# Altium PCB DM0249.PcbDoc (part 1 of 2)
Units mm, origin at the board's own origin, x right, y up, seen from the top; angles counter-clockwise.
Board outline 25 x 23.86 mm, 4 copper layers (Top Copper, Signal Layer 1, Layer 1, Bottom Layer), stack 1.602 mm thick; 50 components, 26 nets, 168 pads, 81 vias.
Unrouted connection lines stored in the file: 43.
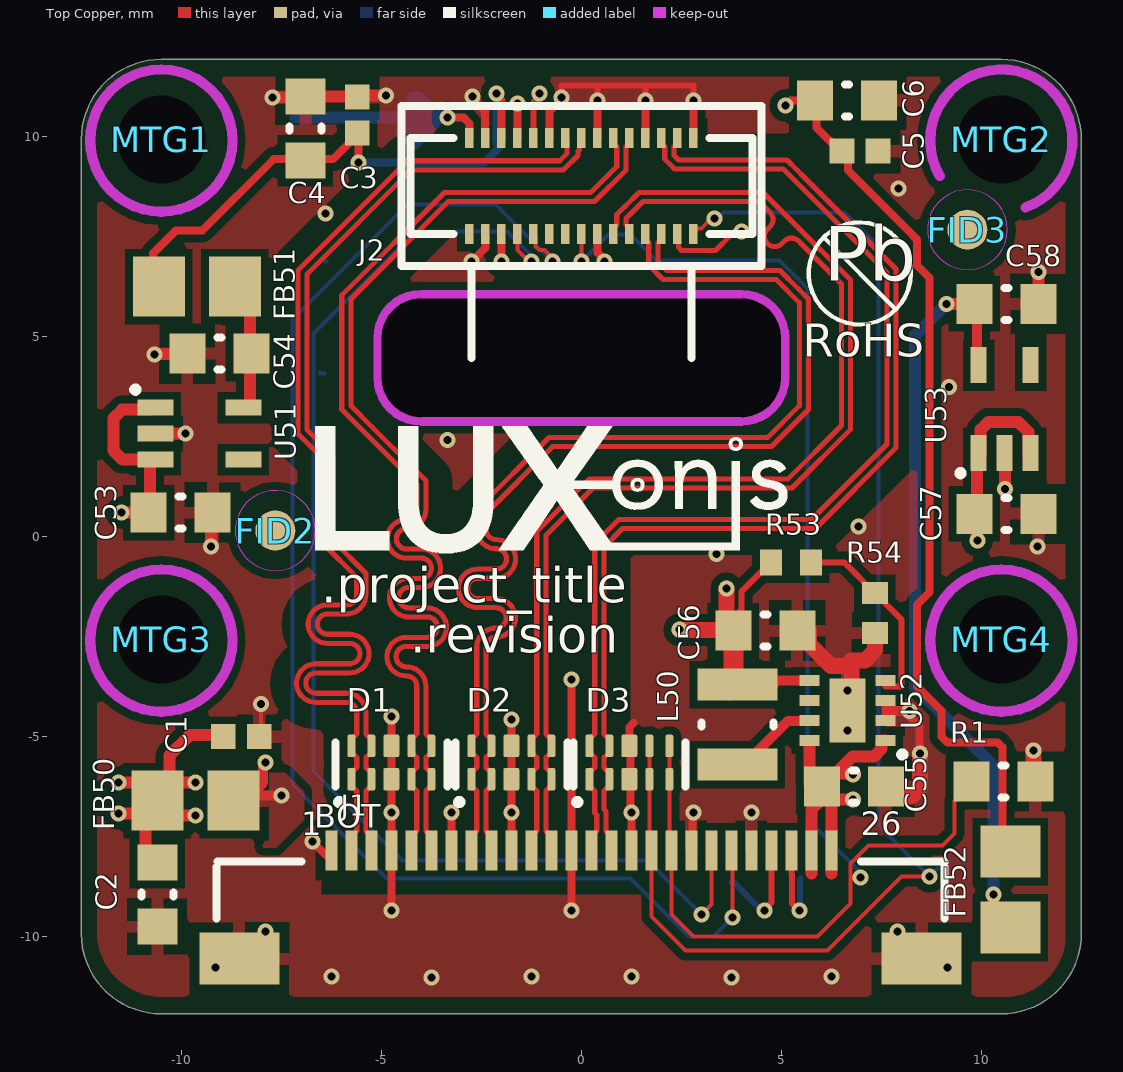
[diagram p0: Top Copper view]
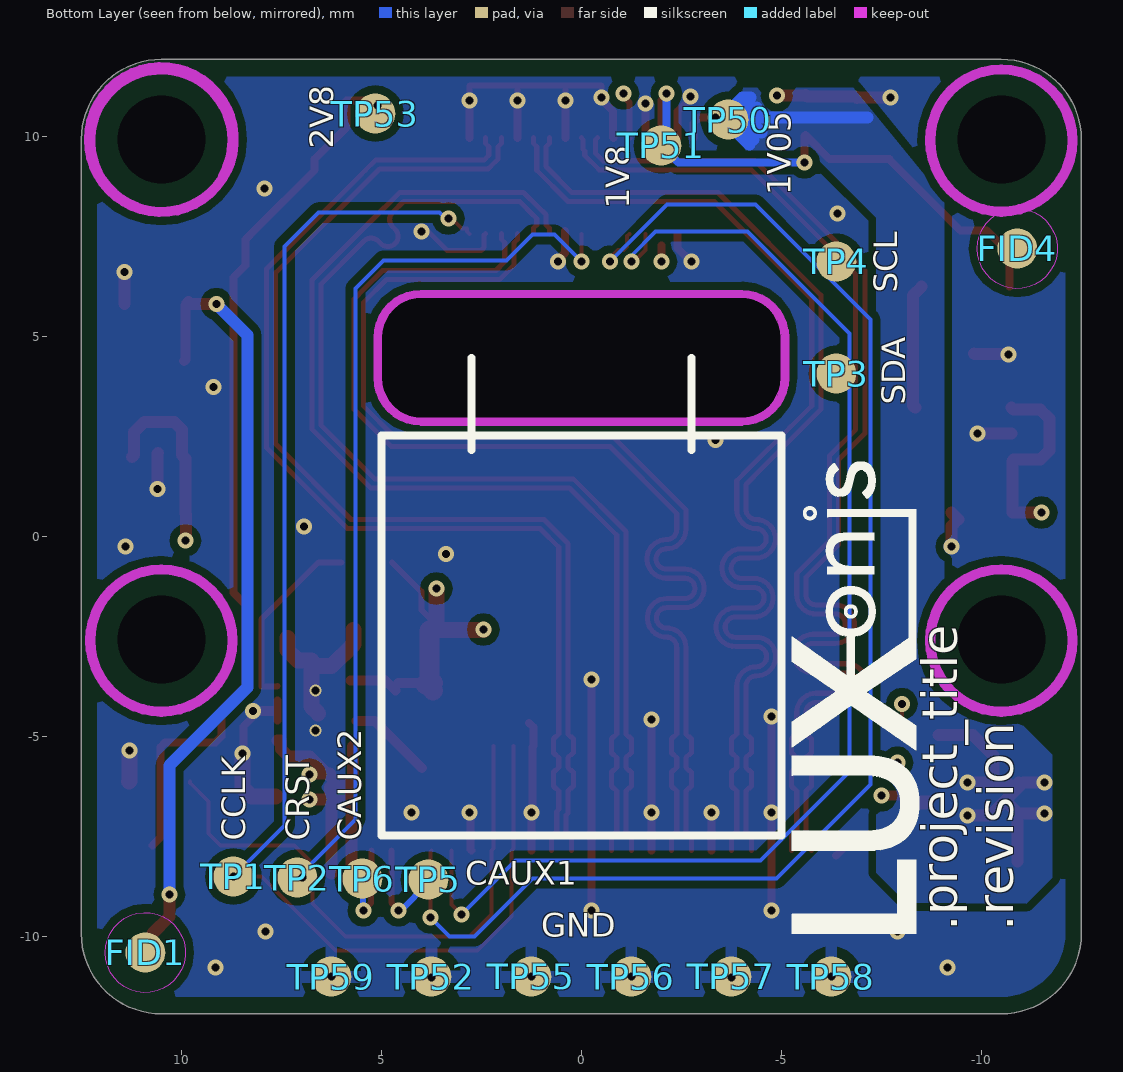
[diagram p1: Bottom Layer view, seen from below]
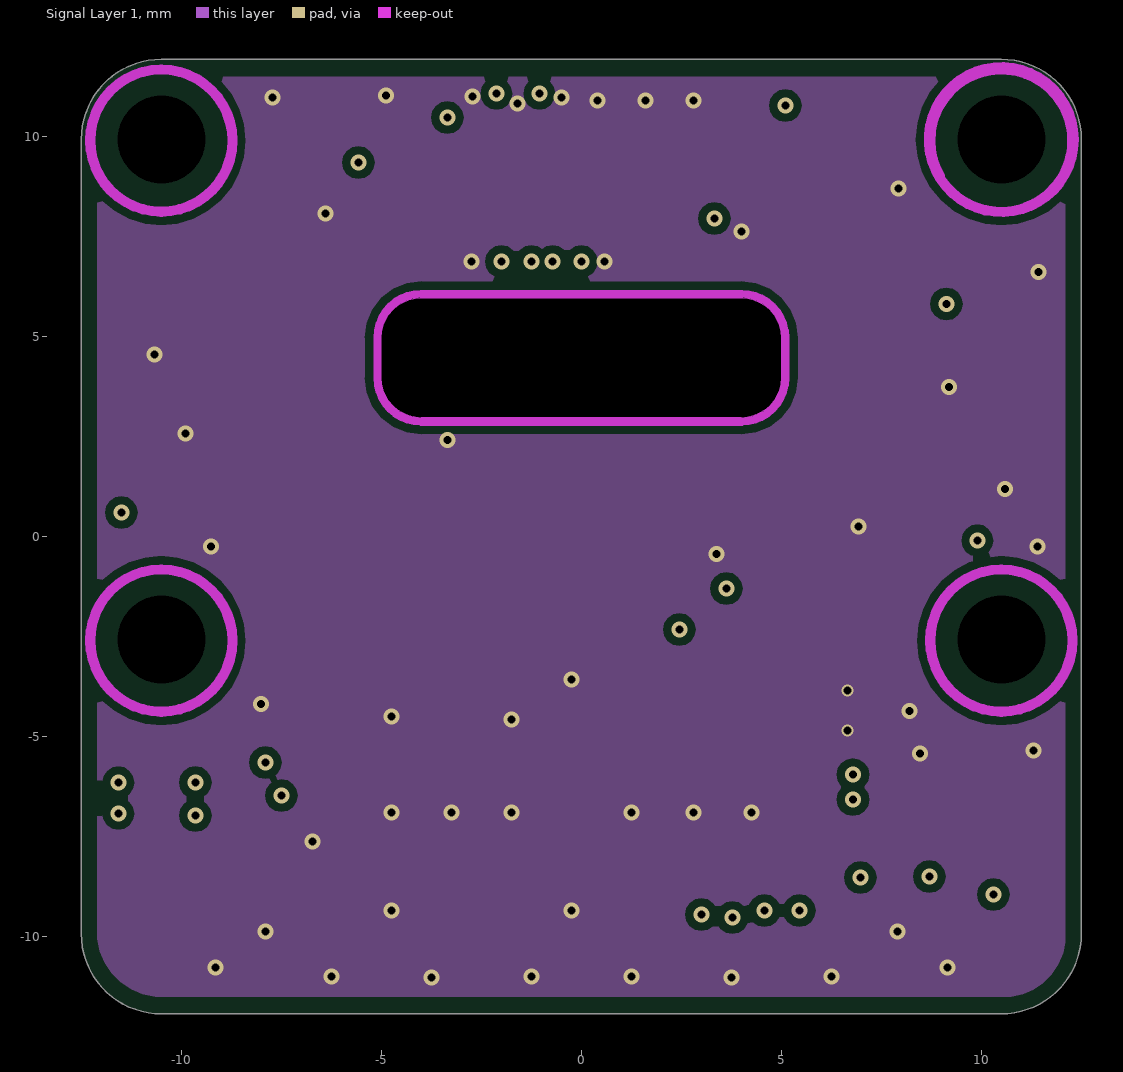
[diagram p2: Signal Layer 1]
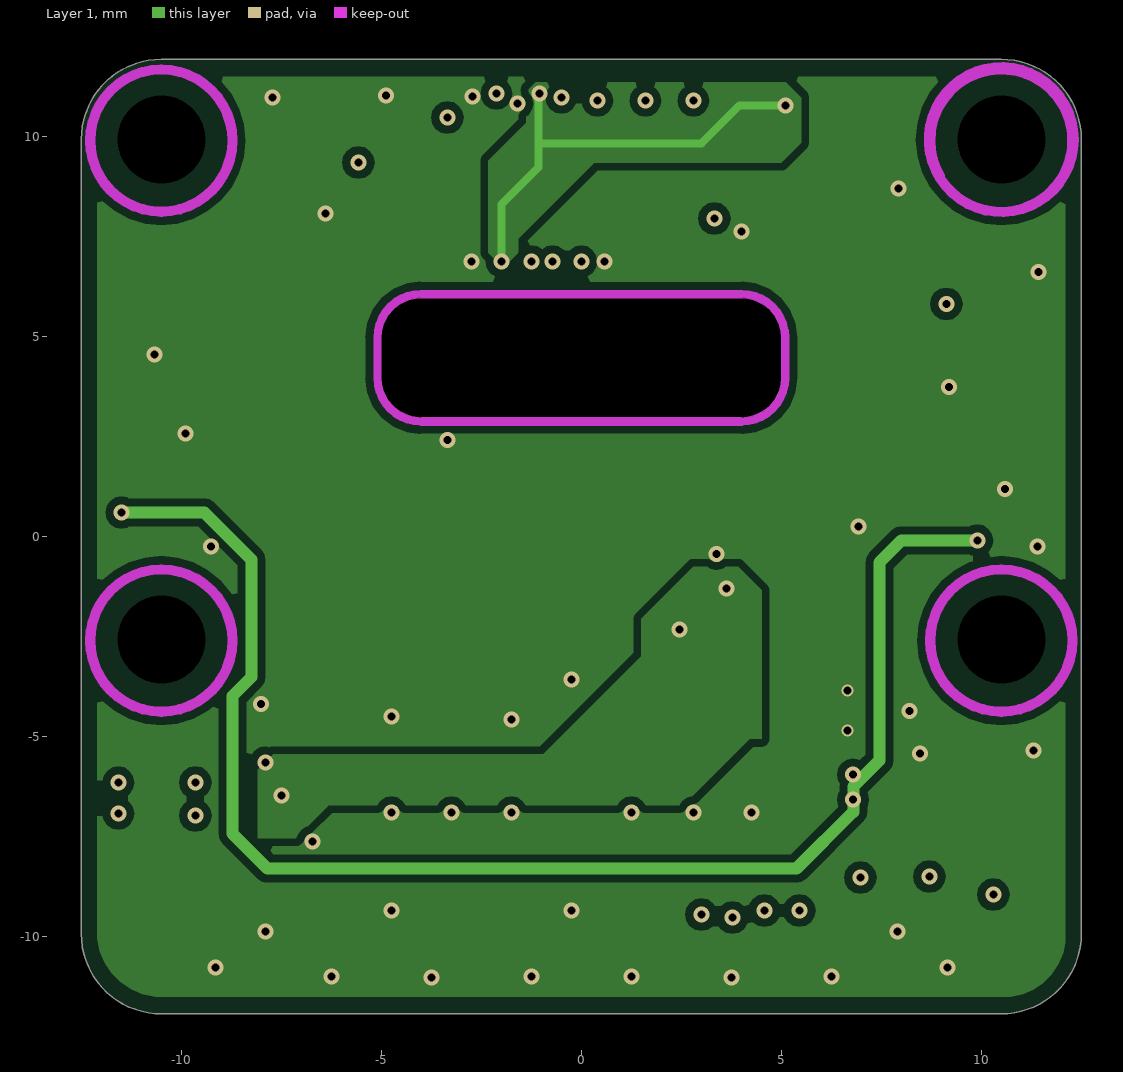
[diagram p3: Layer 1]

## Layer stack, top to bottom
Top Mask: solder mask 0.018, Solder Resist, Dk 4.2
Top Copper: signal copper 0.0356
Dielectric 1: prepreg 0.18, PP-021, Dk 4.2
Signal Layer 1: signal copper 0.0356
Core: core 1.1, Core-042, Dk 4.2
Layer 1: signal copper 0.0356
Dielectric 2: prepreg 0.18, PP-021, Dk 4.2
Bottom Layer: signal copper 0.0356
Bottom Solder: solder mask 0.018, Solder Resist, Dk 4.2

## Board outline
-12.5,-9.931 -12.5,9.931 cw(c-10.5,9.931) -10.5,11.931 10.5,11.931 cw(c10.5,9.931) 12.5,9.931 12.5,-9.931 cw(c10.5,-9.931) 10.5,-11.931 -10.5,-11.931 cw(c-10.5,-9.931)

## Design rules (kind name [scope] priority, off if disabled: settings)
AssemblyTestPointUsage [All] p1 off:
AssemblyTestpoint [All] p1 off: testpointundercomponent=TRUE minsize=1.016 maxsize=2.54 preferedsize=1.524 minholesize=0 maxholesize=1.016 preferedholesize=0.813 testpointgrid=0.025 usegrid=TRUE gridtolerance=0 allowsidetop=TRUE allowsidebottom=TRUE
BoardOutlineClearance [All] p1: gap=0.381 ignorepadtopadclearanceinfootprint=FALSE
Clearance "0.6plane clearence" [InPolygon vs InNetClass('SENSORMIPI')] p1: gap=0.6 ignorepadtopadclearanceinfootprint=FALSE except(0: Arc-Hole Track-Hole SMDPad-Hole THPad-Hole Via-Hole Fill-Hole Poly-Hole Region-Hole Text-Hole; 0.2: Arc-Via Track-Via SMDPad-Via THPad-Via Via-Via Via-Fill Via-Poly Via-Region Via-Text)
Clearance Poly [InPolygon] p2: gap=0.2 ignorepadtopadclearanceinfootprint=FALSE except(0: Arc-Hole Track-Hole SMDPad-Hole THPad-Hole Via-Hole Fill-Hole Poly-Hole Region-Hole Text-Hole)
Clearance [All] p3: gap=0.1 ignorepadtopadclearanceinfootprint=FALSE except(0: Arc-Hole Track-Hole SMDPad-Hole THPad-Hole Via-Hole Fill-Hole Poly-Hole Region-Hole Text-Hole)
ComponentClearance [All] p1 off: gap=0.254 collisioncheckmode=3 verticalgap=0.254 showdistances=FALSE
DiffPairsRouting DiffPair_SENSORMIPI_DiffPairsRouting [InDifferentialPairClass('SENSORMIPI')] p1: maxlimit=0.254 minlimit=0.102 mostfreqgap=0.254 toplayer_maxgap=0.102 toplayer_prefgap=0.102 toplayer_minwidth=0.127 toplayer_maxwidth=0.127 toplayer_prefwidth=0.127 bottomlayer_maxgap=0.102 bottomlayer_prefgap=0.102 bottomlayer_minwidth=0.127 bottomlayer_maxwidth=0.127 bottomlayer_prefwidth=0.127 impedanceprofiledriven=TRUE impedanceprofileid={A69A43D8-E903-443C-922A-36361071E35C} impedanceprofilevalue=100.000000 maxuncoupledlength=12.7
DiffPairsRouting [All] p2: maxlimit=0.254 minlimit=0.102 mostfreqgap=0.254 toplayer_maxgap=0.102 toplayer_prefgap=0.102 toplayer_minwidth=0.127 toplayer_maxwidth=0.127 toplayer_prefwidth=0.127 bottomlayer_maxgap=0.102 bottomlayer_prefgap=0.102 bottomlayer_minwidth=0.127 bottomlayer_maxwidth=0.127 bottomlayer_prefwidth=0.127 impedanceprofiledriven=TRUE impedanceprofileid={A69A43D8-E903-443C-922A-36361071E35C} impedanceprofilevalue=100.000000 maxuncoupledlength=12.7
FabricationTestPointUsage [All] p1 off: valid=0 allowmultiple=FALSE
FabricationTestpoint [All] p1 off: side=3 testpointundercomponent=TRUE minsize=1.016 maxsize=2.54 preferedsize=1.524 minholesize=0 maxholesize=1.016 preferedholesize=0.813 testpointgrid=0.025 allowsidetop=TRUE allowsidebottom=TRUE usegrid=TRUE gridtolerance=0
FanoutControl Fanout_BGA [IsBGA] p1 off: bgadir=Out bgaviamode=Centered fanoutstyle=Auto fanoutdirection=Alternating viagrid=0.025 // Fanout_BGA (Default Rule)
FanoutControl Fanout_LCC [IsLCC] p2 off: bgadir=Out bgaviamode=Centered fanoutstyle=Auto fanoutdirection=Alternating viagrid=0.025 // Fanout_LCC (Default Rule)
FanoutControl Fanout_SOIC [IsSOIC] p3 off: bgadir=Out bgaviamode=Centered fanoutstyle=Auto fanoutdirection=Alternating viagrid=0.025 // Fanout_SOIC (Default Rule)
FanoutControl Fanout_Small [(CompPinCount < 5)] p4 off: bgadir=Out bgaviamode=Centered fanoutstyle=Auto fanoutdirection=OutThenIn viagrid=0.025 // Fanout_Small (Default Rule)
FanoutControl Fanout_Default [All] p5 off: bgadir=Out bgaviamode=Centered fanoutstyle=Auto fanoutdirection=Alternating viagrid=0.025 // Fanout_Default (Default Rule)
Height [All] p1 off: minheight=0 maxheight=25.4 prefheight=12.7
HoleSize [All] p1 off: absolutevalues=TRUE maxlimit=2.54 minlimit=0.13 maxpercent=80.000 minpercent=20.000
HoleToHoleClearance [All] p1: gap=0.21 allowstackedmicrovias=TRUE
LayerPairs [All] p1 off: enforce=TRUE
Length "InNet('CAM1_C_P') Or InNet('CAM1_D1_P')" [InNet('CAM1_C_P') Or InNet('CAM1_D1_P')] p1: maxlimit=40.882 minlimit=0
MatchedLengths MatchedLengths-SENSORMIPI [InNetClass('SENSORMIPI')] p1: tolerance=0.25 checknetsindiffpair=TRUE checkdiffpairvsdiffpair=FALSE checkxsignals=FALSE checkothers=FALSE
MatchedLengths DiffPair_SENSORMIPI_MatchedLengths [InNetClass('SENSORMIPI')] p2: tolerance=0.5 checknetsindiffpair=FALSE checkdiffpairvsdiffpair=TRUE checkxsignals=TRUE checkothers=TRUE
MinimumSolderMaskSliver [All] p1 off: minsoldermaskwidth=0.254
PasteMaskExpansion [All] p1 off: expansion=0
PlaneClearance [All] p1: clearance=0.3
PlaneConnect via [IsVia] p1: planeconnectstyle=Direct reliefexpansion=0.508 reliefentries=4 reliefconductorwidth=0.254 reliefairgap=0.254
PlaneConnect [All] p2: planeconnectstyle=Relief reliefexpansion=0.3 reliefentries=4 reliefconductorwidth=0.4 reliefairgap=0.3
PolygonConnect GND_VIA [isvia] p1: connectstyle=Direct reliefconductorwidth=0.254 reliefentries=4 polygonreliefangle="90 Angle" airgapwidth=0.254
PolygonConnect [All] p2: connectstyle=Relief reliefconductorwidth=0.3 reliefentries=4 polygonreliefangle="90 Angle" airgapwidth=0.254
RoomDefinition DM0249_BW235_IMX378 [InComponentClass('DM0249_BW235_IMX378')] p1: confinementstyle=ConfineIn formatcopy=TRUE lockcomponents=FALSE outline -196.555,-73.08 -145.755,-73.08 -145.755,-47.68 -196.555,-47.68
RoutingCorners [All] p1 off: cornerstyle=45-Degree minsetback=2.54 maxsetback=2.54
RoutingPriority [All] p1 off: routingpriority=0
RoutingTopology [All] p1 off: topology=Shortest
RoutingVias [All] p1: holewidth=0.15 width=0.275 viastyle="Through Hole" minholewidth=0.13 minwidth=0.275 maxholewidth=0.4 maxwidth=0.8
SMDNeckDown [All] p1 off: percent=50.000
SilkToSilkClearance [All] p1 off: silktosilkclearance=0.254
SilkToSolderMaskClearance SilkscreenOverComponentPads [IsPad] p1 off: minsilkscreentomaskgap=0.254 clearancetoexposedcopper=TRUE
SolderMaskExpansion [All] p1 off: expansion=0.102 istentingtop=FALSE
Width [All] p1: maxlimit=5 minlimit=0.1 preferedwidth=0.1 minimp=50.000000 maximp=50.000000 favimp=50.000000
6 further rules are at their usual default settings.

## Classes and differential pairs
component class DM0249_BW235_IMX378: C1 C2 C3 C4 C5 C6 D1 D2 D3 FID1 FID2 FID3 FID4 J1 J2 MTG1 MTG2 MTG3 MTG4 R1 TP1 TP2 TP3 TP4 TP5 TP6
component class Power: C53 C54 C55 C56 C57 C58 FB50 FB51 FB52 L50 R53 R54 TP50 TP51 TP52 TP53 TP55 TP56 TP57 TP58 TP59 U51 U52 U53
net class SENSORMIPI: MIPI_C_N MIPI_C_P MIPI_D0_N MIPI_D0_P MIPI_D1_N MIPI_D1_P MIPI_D2_N MIPI_D2_P MIPI_D3_N MIPI_D3_P
differential pair MIPI_C: +MIPI_C_P -MIPI_C_N
differential pair MIPI_D0: +MIPI_D0_P -MIPI_D0_N
differential pair MIPI_D1: +MIPI_D1_P -MIPI_D1_N
differential pair MIPI_D2: +MIPI_D2_P -MIPI_D2_N
differential pair MIPI_D3: +MIPI_D3_P -MIPI_D3_N

## Components (designator, comment, footprint, x,y, rotation, side; value= is the part's Value field where it differs from the comment)
C1 "0.1uF 0402" CAPC0402(1005)70_N -8.5,-5 r180 top
C2 "10uF 0603" CAPC0603(1608)100_N -10.6,-8.95 r90 top
C3 "0.1uF 0402" CAPC0402(1005)70_N -5.602,10.537 r270 top
C4 "10uF 0603" CAPC0603(1608)100_N -6.897,10.196 r270 top
C5 "0.1uF 0402" CAPC0402(1005)70_N 6.966,9.636 r180 top
C6 "10uF 0603" CAPC0603(1608)100_N 6.636,10.906 r180 top
C53 "10uF 0603" CAPC0603(1608)100_N -10.016,0.6 r180 top
C54 "10uF 0603" CAPC0603(1608)100_N -9.05,4.573 r0 top
C55 "10uF 0603" CAPC0603(1608)100_N 6.815,-6.252 r180 top
C56 "22uF 0603" CAPC0603(1608)100_N 4.6,-2.35 r180 top
C57 "10uF 0603" CAPC0603(1608)100_N 10.625,0.565 r180 top
C58 "10uF 0603" CAPC0603(1608)100_N 10.625,5.815 r180 top
D1 "TPD4E02B04DQAR" TPD4E02B04DQAR -4.75,-5.65 r0 top
D2 "TPD4E02B04DQAR" TPD4E02B04DQAR -1.75,-5.65 r0 top
D3 "TPD4E02B04DQAR" TPD4E02B04DQAR 1.2,-5.65 r0 top
FB50 "600R/100MHz" 2508056017Y2 -9.65,-6.6 r180 top
FB51 "600R/100MHz" 2508056017Y2 -9.61,6.248 r180 top
FB52 "600R/100MHz" 2508056017Y2 10.725,-8.825 r90 top
FID1 "FIDUCIAL_ROUND_1MM" FIDUCIAL_ROUND_1MM 10.9,-10.4 r180 bottom
FID2 "FIDUCIAL_ROUND_1MM" FIDUCIAL_ROUND_1MM -7.65,0.15 r90 top
FID3 "FIDUCIAL_ROUND_1MM" FIDUCIAL_ROUND_1MM 9.652,7.671 r90 top
FID4 "FIDUCIAL_ROUND_1MM" FIDUCIAL_ROUND_1MM -10.9,7.2 r90 bottom
J1 "CONN FFC TOP 26POS 0.50MM R/A" 5052782633 -6.25,-7.85 r0 top locked
J2 "24-5804-030-000-829+" A12N02A-201_1.6mmbrd_MatedModule 0,8.77 r180 top locked
L50 "1uH, 3.2A, 20%" DFE252012P-1R0M=P2 3.9,-4.7 r90 top
MTG1 "" MOUNTING_HOLE_M2_RPI_CAM -10.5,9.931 r90 top locked
MTG2 "" MOUNTING_HOLE_M2_RPI_CAM 10.5,9.931 r90 top locked
MTG3 "" MOUNTING_HOLE_M2_RPI_CAM -10.5,-2.569 r90 top locked
MTG4 "" MOUNTING_HOLE_M2_RPI_CAM 10.5,-2.569 r90 top locked
R1 "10K 0603" RESC0603(1608)_N 10.55,-6.125 r0 top
R53 "53.6k 0402" RESC0402(1005)_N 5.237,-0.643 r180 top
R54 "39.2k 0402" RESC0402(1005)_N 7.341,-1.912 r90 top
TP1 "TP100_150_NS" TP100_150_NS 8.7,-8.5 r90 bottom
TP2 "TP100_150_NS" TP100_150_NS 7.1,-8.525 r90 bottom
TP3 "TP100_150_NS" TP100_150_NS -6.375,4.075 r90 bottom
TP4 "TP100_150_NS" TP100_150_NS -6.375,6.875 r90 bottom
TP5 "TP100_150_NS" TP100_150_NS 3.825,-8.575 r90 bottom
TP6 "TP100_150_NS" TP100_150_NS 5.475,-8.55 r90 bottom
TP50 "TP100_150_NS" TP100_150_NS -3.675,10.425 r0 bottom
TP51 "TP100_150_NS" TP100_150_NS -2,9.775 r180 bottom
TP52 "TP100_150_NS" TP100_150_NS 3.75,-11 r90 bottom
TP53 "TP100_150_NS" TP100_150_NS 5.15,10.575 r0 bottom
TP55 "TP100_150_NS" TP100_150_NS 1.25,-11 r90 bottom
TP56 "TP100_150_NS" TP100_150_NS -1.25,-11 r90 bottom
TP57 "TP100_150_NS" TP100_150_NS -3.75,-11 r90 bottom
TP58 "TP100_150_NS" TP100_150_NS -6.25,-11 r90 bottom
TP59 "TP100_150_NS" TP100_150_NS 6.25,-11 r90 bottom
U51 "TLV70018DCK" TLV70018DCK -9.55,2.573 r270 top
U52 "TLV62080DSG" TLV62080DSG 6.65,-4.35 r180 top
U53 "TLV70028DCK" TLV70028DCK 10.582,3.185 r0 top locked

## Footprints (in the part's own frame and the unit in brackets; to place one, negate y for a bottom-side part, rotate by r counter-clockwise, add the part's x,y. Pads: shape width x height; smd on the part's side, far side on the other; paste and mask are expansions set on the pad)
2508056017Y2 [mm] "2508056017Y2 Chip Inductor, 2-Leads, Body 2.00x1.25mm"
  rect 1.3x1.5 smd: 1(-0.95,0) 2(0.95,0)
  body extent -1.1,-0.72 1.1,0.72, height 1.45
5052782633 [mm] "26pin Molex FFC 0.5mm TOP"
  rect 0.3x1 smd: 1(0,0) 2(0.5,0) 3(1,0) 4(1.5,0) 5(2,0) 6(2.5,0) 7(3,0) 8(3.5,0) 9(4,0) 10(4.5,0) 11(5,0) 12(5.5,0) 13(6,0) 14(6.5,0) 15(7,0) 16(7.5,0) 17(8,0) 18(8.5,0) 19(9,0) 20(9.5,0) 21(10,0) 22(10.5,0) 23(11,0) 24(11.5,0) 25(12,0) 26(12.5,0)
  rect 2x1.3 smd: MP1(-2.3,-2.7) MP2(14.757,-2.7)
  silkscreen extent -2.87,-1.7 15.34,-0.27, body extent -3.01,-5.08 15.49,0.22, height 1.88
A12N02A-201_1.6mmbrd_MatedModule [mm] "connector: 24-5804-030-000-829+ (1.4mm height w/ module mated)"
  rect 0.22x0.5 smd mask+0.05: 1(-2.8,-1.2) 2(-2.4,-1.2) 3(-2,-1.2) 4(-1.6,-1.2) 5(-1.2,-1.2) 6(-0.8,-1.2) 7(-0.4,-1.2) 8(0,-1.2) 9(0.4,-1.2) 10(0.8,-1.2) 11(1.2,-1.2) 12(1.6,-1.2) 13(2,-1.2) 14(2.4,-1.2) 15(2.8,-1.2) 16(2.8,1.2) 17(2.4,1.2) 18(2,1.2) 19(1.6,1.2) 20(1.2,1.2) 21(0.8,1.2) 22(0.4,1.2) 23(0,1.2) 24(-0.4,1.2) 25(-0.8,1.2) 26(-1.2,1.2) 27(-1.6,1.2) 28(-2,1.2) 29(-2.4,1.2) 30(-2.8,1.2)
  Bottom Layer keep-out region: -4.999,16.237 4.999,16.237 4.999,6.239 -4.999,6.239
  Keep-Out Layer board cut-out: -5,4.8 -4.924,5.183 -4.707,5.507 -4.383,5.724 -4,5.8 -4,5.8 4,5.8 4.383,5.724 4.707,5.507 4.924,5.183 5,4.8 5,4.8 5,3.8 4.924,3.417 4.707,3.093 4.383,2.876 4,2.8 4,2.8 -4,2.8 -4.383,2.876 -4.707,3.093 -4.924,3.417 -5,3.8 -5,3.8
  Keep-Out Layer lines w0.2: 5.1,4.8 ccw(c4,4.8) 4,5.9 -4,5.9 ccw(c-4,4.8) -5.1,4.8 -5.1,3.8 ccw(c-4,3.8) -4,2.7 0,2.7 4,2.7 ccw(c4,3.8) 5.1,3.8 5.1,4.8
  silkscreen extent -4.5,-2 4.5,4.3, body extent -5,-5.72 5,16.24, height 6.18
CAPC0402(1005)70_N [mm] "Chip Capacitor, Body 1.0x0.5mm, Height 0.7mm, IPC Medium Density"
  rect 0.62x0.62 smd: 1(-0.45,0) 2(0.45,0)
  body extent -0.55,-0.3 0.55,0.3, height 0.7
CAPC0603(1608)100_N [mm] "Chip Capacitor, Body 1.6x0.8mm, Height 1.0mm, IPC Medium Density"
  rect 0.9x1 smd: 1(-0.8,0) 2(0.8,0)
  silkscreen extent -0.05,-0.4 0.05,0.4, body extent -0.87,-0.48 0.88,0.47, height 1
DFE252012P-1R0M=P2 [mm] "Chip Inductor, 2-Leads, Body 2.40x2.00mm, IPC High Density"
  rect 0.8x2 smd: 1(-1,0) 2(1,0)
  silkscreen extent -0.05,-0.9 0.05,0.9, body extent -1.25,-1.1 1.25,1.1, height 1.2
FIDUCIAL_ROUND_1MM [mm] "Round, 1mm dia"
  round 1 smd paste-1 mask+0.5: 1(0,0)
  Top Copper keep-out circle w0.025: c0,0 r1
MOUNTING_HOLE_M2_RPI_CAM [mil] "NPTH 2.2mm Hole Used in Raspberry Pi Camera"
  round 60 hole 86.61 unplated: 1(0,0)
RESC0402(1005)_N [mm] "Chip Resistor, Body 1.0x0.5mm, IPC Medium Density"
  rect 0.55x0.65 smd: 1(-0.5,0) 2(0.5,0)
  body extent -0.52,-0.27 0.53,0.28, height 0.4
RESC0603(1608)_N [mm] "Chip Resistor, Body 1.6x0.8mm, IPC Medium Density"
  rect 0.9x1 smd: 1(-0.8,0) 2(0.8,0)
  silkscreen extent -0.05,-0.4 0.05,0.4, body extent -0.85,-0.47 0.85,0.47, height 0.6
TLV62080DSG [mm] "WSON-8, 2.1mm x 2.1mm x 0.8mm"
  rect 0.5x0.28 smd mask+0.07: 1(-0.95,0.75) 2(-0.95,0.25) 3(-0.95,-0.25) 4(-0.95,-0.75) 5(0.95,-0.75) 6(0.95,-0.25) 7(0.95,0.25) 8(0.95,0.75)
  rect 0.9x1.6 smd mask+0.07: 9(0,0)
  silkscreen extent -1.4,1.07 -1.35,1.13, body extent -1.05,-1.05 1.05,1.05, height 0.8
TLV70018DCK [mm] "SC70-5 1.1mm"
  rect 0.4x0.9 smd paste-0.025 mask+0.05: 1(-0.65,-1.1) 2(0,-1.1) 3(0.65,-1.1) 4(0.65,1.1) 5(-0.65,1.1)
  silkscreen extent -1.13,-1.63 -1.07,-1.57, body extent -1.1,-1.2 1.1,1.2, height 1.1
TLV70028DCK [mm] "SC70-5 1.1mm"
  rect 0.4x0.9 smd paste-0.025 mask+0.05: 1(-0.65,-1.1) 2(0,-1.1) 3(0.65,-1.1) 4(0.65,1.1) 5(-0.65,1.1)
  silkscreen extent -1.13,-1.63 -1.07,-1.57, body extent -1.1,-1.2 1.1,1.2, height 1.1
TP100_150_NS [mm] "1mm dia pad, 1.5mm clearance, no silk screen"
  round 1 smd paste-2: 1(0,0)
TPD4E02B04DQAR [mm] "TPD4E02B04DQAR"
  rrect50% 0.2x0.565 smd mask+0.07: 1(-1,-0.417) 2(-0.5,-0.417) 4(0.5,-0.417) 5(1,-0.417) 6(1,0.417) 7(0.5,0.417) 9(-0.5,0.417) 10(-1,0.417)
  rrect25% 0.4x0.565 smd mask+0.07: 3(0,-0.417) 8(0,0.417)
  silkscreen extent -1.4,-1.01 1.4,0.5, body extent -1.2,-0.71 1.2,0.71, height 0.55

## Part data
C1 C3 C5: library part GRM155R71A104JA01D, "CAP CER 0.1UF 10V X7R 0402 5%", Capacitance=100nF, Case/Package=0402, Case Code (Metric)=1005, Dielectric=X7R, Manufacturer 1=Murata, Max Operating Temperature=125°C, Min Operating Temperature=-55°C, Package Quantity=10000, Supplier Part Number 1=490-10777-1-ND, Tolerance=5%, Voltage Rating=10V, Case Code (Imperial)=0402, ComponentLink1Description=https://datasheet.ciiva.com/5411/product-5411135.pdf?src-supplier=Mouser, ComponentLink1URL=https://datasheet.ciiva.com/5411/product-5411135.pdf?src-supplier=Mouser, ComponentLink2Description=https://datasheet.ciiva.com/11618/c02e-11618821.pdf?src-supplier=Avnet, ComponentLink2URL=https://datasheet.ciiva.com/11618/c02e-11618821.pdf?src-supplier=Avnet, Depth=0.5mm, Height=0.5mm, Lead Free="Lead Free", Length=1mm, Manufacturer Part Number 1=GRM155R71A104JA01D, Mount="Surface Mount", Packaging="Tape and Reel", Pricing 1="1=0.10000, 10=0.02500, 100=0.01130, 500=0.00806, 1000=0.00633, 2500=0.00575, 5000=0.00529 (USD)", Radiation Hardening=No, RoHS=Yes, Stock 1=1346709, Supplier 1=Digi-Key, Termination=SMD/SMT, Thickness=0.022inch, Voltage Rating (DC)=10V, Width=0.02inch
C2 C4 C6 C53 C54 C55 C57 C58: library part GRM188R61A106ME69D, "CAP CER 10UF 10V X5R 0603 20%", Capacitance=10uF, Case/Package=0603, Case Code (Metric)=1608, Dielectric=X5R, Manufacturer 1=Murata, Max Operating Temperature=85°C, Min Operating Temperature=-55°C, Package Quantity=4000, Supplier Part Number 1=490-10475-1-ND, Tolerance=20%, Voltage Rating=10V, Case Code (Imperial)=0603, ComponentLink1Description=http://www.mouser.com/ds/2/281/c02e-2905.pdf?src-supplier=Mouser, ComponentLink1URL=http://www.mouser.com/ds/2/281/c02e-2905.pdf?src-supplier=Mouser, ComponentLink2Description=http://components.arrow.com/part/dataview/0323_06119472?src-supplier=Arrow+Europe, ComponentLink2URL=http://components.arrow.com/part/dataview/0323_06119472?src-supplier=Arrow+Europe, ComponentLink3Description=http://www.farnell.com/datasheets/2048014.pdf?src-supplier=Farnell, ComponentLink3URL=http://www.farnell.com/datasheets/2048014.pdf?src-supplier=Farnell, ComponentLink4Description=http://www.farnell.com/datasheets/1872210.pdf?src-supplier=Farnell, ComponentLink4URL=http://www.farnell.com/datasheets/1872210.pdf?src-supplier=Farnell, ComponentLink5Description=http://search.murata.co.jp/Ceramy/image/img/A01X/G101/ENG/GRM188R61A106ME69-01.pdf?src-supplier=Digi-Key, ComponentLink5URL=http://search.murata.co.jp/Ceramy/image/img/A01X/G101/ENG/GRM188R61A106ME69-01.pdf?src-supplier=Digi-Key, ComponentLink6Description=http://www.farnell.com/datasheets/1872210.pdf?src-supplier=Newark, ComponentLink6URL=http://www.farnell.com/datasheets/1872210.pdf?src-supplier=Newark, ComponentLink7Description=http://www.farnell.com/datasheets/2048014.pdf?src-supplier=Element14, ComponentLink7URL=http://www.farnell.com/datasheets/2048014.pdf?src-supplier=Element14, ComponentLink8Description=http://www.farnell.com/datasheets/2048014.pdf?src-supplier=Newark, ComponentLink8URL=http://www.farnell.com/datasheets/2048014.pdf?src-supplier=Newark, Depth=0.8mm, Height=0.8mm, Lead Free="Lead Free", Length=1.6mm, Manufacturer Part Number 1=GRM188R61A106ME69D, Material=Ceramic, Mount="Surface Mount", Packaging="Tape and Reel", Pricing 1="1=0.21000, 10=0.14100, 100=0.07130, 500=0.04876, 1000=0.04313 (USD)", REACH SVHC=Unknown, RoHS=Yes, Stock 1=2873098, Supplier 1=Digi-Key, Termination=SMD/SMT, Thickness=0.035inch, Voltage Rating (DC)=10V, Weight=0.000222oz, Width=0.8mm
C56: library part GRM188R61A226ME15D, "CAP CER 22UF 10V X5R 0603 20%", Capacitance=22uF, Case/Package=0603, Case Code (Metric)=1608, Dielectric=X5R, Manufacturer 1=Murata, Max Operating Temperature=85°C, Min Operating Temperature=-55°C, Package Quantity=4000, Supplier Part Number 1=490-10476-1-ND, Tolerance=20%, Voltage Rating=10V, Case Code (Imperial)=0603, ComponentLink1Description=https://datasheet.ciiva.com/46444/1769893-46444975.pdf?src-supplier=Element14, ComponentLink1URL=https://datasheet.ciiva.com/46444/1769893-46444975.pdf?src-supplier=Element14, Depth=0.8mm, Height=0.8mm, Lead Free="Lead Free", Length=1.6mm, Manufacturer Part Number 1=GRM188R61A226ME15D, Material=Ceramic, Mount="Surface Mount", Packaging="Tape and Reel", Pricing 1="1=0.31000, 10=0.21500, 100=0.12160, 500=0.08584, 1000=0.07512 (USD)", REACH SVHC="No SVHC", RoHS=Yes, Stock 1=984716, Supplier 1=Digi-Key, Termination=SMD/SMT, Thickness=0.039inch, Voltage Rating (DC)=10V, Weight=0.000222oz, Width=0.8mm
D1 D2 D3: "TVS DIODE 3.6V 8.8V 10USON 8.8V (Typ) Clamp 5A (8/20µs) Ipp Tvs Diode Surface Mount 10-USON (2.5x1)", Clamping Voltage=8.8V, Manufacturer 1="Texas Instruments", Max Operating Temperature=125°C, Min Breakdown Voltage=5.5V, Min Operating Temperature=-40°C, Operating Supply Voltage=3.6V, Peak Pulse Current=5A, Peak Pulse Power=17W, Power Line Protection=No, Supplier Part Number 1=296-43875-1-ND, ComponentLink1Description=http://www.ti.com/general/docs/lit/getliterature.tsp?genericPartNumber=TPD4E02B04&amp;&amp;fileType=pdf&src-supplier=Element14, ComponentLink1URL=http://www.ti.com/general/docs/lit/getliterature.tsp?genericPartNumber=TPD4E02B04&amp;&amp;fileType=pdf&src-supplier=Element14, ComponentLink2Description=http://www.ti.com/lit/ds/symlink/tpd4e02b04.pdf?src-supplier=Farnell, ComponentLink2URL=http://www.ti.com/lit/ds/symlink/tpd4e02b04.pdf?src-supplier=Farnell, ComponentLink3Description=http://www.ti.com/lit/ds/symlink/tpd4e02b04.pdf?src-supplier=Newark, ComponentLink3URL=http://www.ti.com/lit/ds/symlink/tpd4e02b04.pdf?src-supplier=Newark, ComponentLink4Description=http://www.ti.com/lit/ds/symlink/tpd4e02b04.pdf?src-supplier=Digi-Key, ComponentLink4URL=http://www.ti.com/lit/ds/symlink/tpd4e02b04.pdf?src-supplier=Digi-Key, Composition=Zener, Interface=USB,HDMI, Lead Free="Lead Free", Manufacturer Part Number 1=TPD4E02B04DQAR, Mount="Surface Mount", Number of Bidirectional Channels=4, Number of Channels=4, Number of Pins=10, Packaging="Cut Tape", Pricing 1="1=0.69000, 10=0.60800, 100=0.46650, 500=0.36874, 1000=0.29499 (USD)", REACH SVHC="No SVHC", Reverse Standoff Voltage=3.6V, RoHS=Yes, Stock 1=25615, Supplier 1=Digi-Key
FB50 FB51 FB52: library part 2508056017Y2, "FERRITE BEAD, 0.1OHM, 2A, 0805, 600R/100MHz", Case/Package=0805, Case Code (Metric)=2012, Current Rating=2A, DC Resistance (DCR)=100mR, Frequency=100MHz, Manufacturer 1=Fair-Rite, Max Operating Temperature=125°C, Min Operating Temperature=-55°C, Package Quantity=4000, Resistance=350mR, Supplier Part Number 1=1934-1487-1-ND, Tolerance=25%, Case Code (Imperial)=0805, ComponentLink1Description=https://datasheet.ciiva.com/3854/3802508056017y2-3854245.pdf?src-supplier=Arrow, ComponentLink1URL=https://datasheet.ciiva.com/3854/3802508056017y2-3854245.pdf?src-supplier=Arrow, ComponentLink2Description=https://datasheet.ciiva.com/22735/652149-22735047.pdf?src-supplier=Element14, ComponentLink2URL=https://datasheet.ciiva.com/22735/652149-22735047.pdf?src-supplier=Element14, ComponentLink3Description=https://datasheet.ciiva.com/1127/26143-1127514.pdf?src-supplier=Farnell, ComponentLink3URL=https://datasheet.ciiva.com/1127/26143-1127514.pdf?src-supplier=Farnell, ComponentLink4Description=https://datasheet.ciiva.com/18090/getdatasheetpartid-212640-18090187.pdf?src-supplier=Verical, ComponentLink4URL=https://datasheet.ciiva.com/18090/getdatasheetpartid-212640-18090187.pdf?src-supplier=Verical, ComponentLink5Description=https://datasheet.ciiva.com/7620/26143-7620140.pdf?src-supplier=Element14, ComponentLink5URL=https://datasheet.ciiva.com/7620/26143-7620140.pdf?src-supplier=Element14, DC Current=2A, Depth=1.25mm, Height=0.9mm, Impedance=600R, Length=2mm, Manufacturer Part Number 1=2508056017Y2, Max DC Current=2A, Military Standard=Not, Number of Pins=2, Packaging="Tape and Reel", Pricing 1="1=0.10000, 10=0.07900, 25=0.07120, 50=0.05240, 100=0.04520, 250=0.03568, 500=0.03014, 1000=0.02538 (USD)", Radiation Hardening=No, REACH SVHC="No SVHC", RoHS=Yes, Stock 1=100491, Supplier 1=Digi-Key, Termination=SMD/SMT, Test Frequency=100MHz, Width=1.25mm
FID1 FID2 FID3 FID4: library part FIDUCIAL, "Fiducial with various available footprints"
J1: library part 5052782633, "0.5 Ffc Zif Btm Cont Embt Pkg 0.5 Fpc Zif Btm FS19", Current Rating=500mA, Flammability Rating="UL94 V-0", Manufacturer=Molex, Manufacturer Part Number=505278-2633, Max Operating Temperature=85°C, Min Operating Temperature=-40°C, Supplier Part Number 1=WM24290CT-ND, Voltage Rating=50V, Actuator Material=Nylon,Glass,Polyamide, Category=Connectors, ComponentLink1Description=http://www.molex.com/pdm_docs/sd/5052782633_sd.pdf?src-supplier=Digi-Key, ComponentLink1URL=http://www.molex.com/pdm_docs/sd/5052782633_sd.pdf?src-supplier=Digi-Key, Contact Material=Bronze, Contact Plating=Tin, Housing Material=Polymer, Mount="Surface Mount", Number of Positions=26, Packaging="Tape and Reel", Pitch=0.02inch, Pricing 1="1=0,85000, 10=0,70400, 100=0,58660, 1000=0,46928 (USD)", RoHS=Yes, Stock 1=8571, Supplier 1=Digi-Key, Termination=Solder
J2: library part A12N02A-201_Connector_(1.6mm_brd), "CONN Series 5804 board to board 0.4mm pitch 30 way connector", Manufacturer 1="Kyocera International Electronic Components", Manufacturer Part Number 1=245804030000829+, Supplier Part Number 1=478-12013-1-ND, ComponentLink1Description=http://global.kyocera.com/prdct/electro/product/pdf/5804.pdf?src-supplier=Digi-Key, ComponentLink1URL=http://global.kyocera.com/prdct/electro/product/pdf/5804.pdf?src-supplier=Digi-Key, MAN=AVX/KYOCERA, MAN PN=24-5804-030-000-829+, Pricing 1="1=1.69000, 10=1.53600, 25=1.44200, 50=1.37940, 100=1.31670, 250=1.19132, 500=1.09726, 1000=0.94050 (USD)", RoHS=Yes, Stock 1=11469, Supplier 1=Digi-Key
L50: library part DFE252012P-1R0M=P2, "FIXED IND 1UH 3.2A 42 MOHM SMD", Case/Package=1008, Case Code (Metric)=2520, Current Rating=4.3A, DC Resistance (DCR)=42mR, Inductance=1uH, Manufacturer=Murata, Manufacturer Part Number=DFE252012P-1R0M=P2, Max DC Current=3.2A, Max Operating Temperature=125°C, Min Operating Temperature=-40°C, Supplier Part Number 1=490-10647-1-ND, Test Frequency=1MHz, Tolerance=20%, Case Code (Imperial)=1008, ComponentLink1Description=http://www.farnell.com/datasheets/2550134.pdf?src-supplier=Farnell, ComponentLink1URL=http://www.farnell.com/datasheets/2550134.pdf?src-supplier=Farnell, ComponentLink2Description=https://www.murata.com/~/media/webrenewal/products/inductor/chip/tokoproducts/wirewoundmetalalloychiptype/m_dfe252012p.ashx?src-supplier=Digi-Key, ComponentLink2URL=https://www.murata.com/~/media/webrenewal/products/inductor/chip/tokoproducts/wirewoundmetalalloychiptype/m_dfe252012p.ashx?src-supplier=Digi-Key, ComponentLink3Description=http://www.murata.com/~/media/webrenewal/products/inductor/chip/tokoproducts/wirewoundmetalalloychiptype/m_dfe252012p.ashx?src-supplier=Digi-Key, ComponentLink3URL=http://www.murata.com/~/media/webrenewal/products/inductor/chip/tokoproducts/wirewoundmetalalloychiptype/m_dfe252012p.ashx?src-supplier=Digi-Key, ComponentLink4Description=http://www.toko.co.jp/products/pdf/inductors/dfe252012p.pdf?src-supplier=Avnet, ComponentLink4URL=http://www.toko.co.jp/products/pdf/inductors/dfe252012p.pdf?src-supplier=Avnet, Composition=Wirewound, Core Material=Ferrite, Depth=2mm, Height - Seated (Max)=0.039inch, Length=0.098inch, Manufacturer 1=Murata, Manufacturer 2=Murata, Manufacturer 3=Murata, Manufacturer 4=Murata, Manufacturer Part Number 1=DFE252012P-1R0M=P2, Manufacturer Part Number 2=DFE252012P-1R0M=P2, Manufacturer Part Number 3=DFE252012P-1R0M=P2, Manufacturer Part Number 4=DFE252012P-1R0M=P2, Mount="Surface Mount", Packaging="Tape and Reel", Pricing 1="1=0.43000, 10=0.37800, 100=0.27030, 500=0.22702, 1000=0.18377 (USD)", Pricing 2="1=0.43000, 10=0.37800, 100=0.27030, 500=0.22702, 1000=0.18377 (USD)", Pricing 3="1=0.43000, 10=0.37900, 50=0.37900, 100=0.27000, 1000=0.18400, 10000=0.14600 (USD)", Pricing 4="1=0.64000, 10=0.56500, 100=0.40500, 500=0.34000, 1000=0.27500 (SGD)", RoHS=Yes, Shielding=Shielded, Stock 1=2560, Stock 2=95, Stock 3=667, Stock 4=41, Supplier 1=Digi-Key, Supplier 2=Digi-Key, Supplier 3=Mouser, Supplier 4=Element14, Supplier Part Number 2=490-10647-6-ND, Supplier Part Number 3=81-DFE252012P-1R0MP2, Supplier Part Number 4=2530071, Width=0.079inch
MTG1 MTG2 MTG3 MTG4: "=CurrentFootprint", B - Value="Not a Part", A - Level=0
R1: library part RC0603FR-0710KL, "RES SMD 10K OHM 1% 1/10W 0603", Case/Package=0603, Case Code (Metric)=1608, Manufacturer 1=Yageo, Max Operating Temperature=155°C, Min Operating Temperature=-55°C, Power Rating=100mW, Resistance=10kR, Supplier Part Number 1=311-10.0KHRCT-ND, Temperature Coefficient=100ppm/°C, Tolerance=1%, Voltage Rating=75V, Voltage Rating (DC)=50V, Case Code (Imperial)=0603, ComponentLink1Description=https://datasheet.ciiva.com/7660/38590-7660789.pdf?src-supplier=Element14, ComponentLink1URL=https://datasheet.ciiva.com/7660/38590-7660789.pdf?src-supplier=Element14, ComponentLink2Description=https://datasheet.ciiva.com/15189/getdatasheetpartid-409289-15189591.pdf?src-supplier=Verical, ComponentLink2URL=https://datasheet.ciiva.com/15189/getdatasheetpartid-409289-15189591.pdf?src-supplier=Verical, ComponentLink3Description=https://datasheet.ciiva.com/46440/1868787-46440891.pdf?src-supplier=Element14, ComponentLink3URL=https://datasheet.ciiva.com/46440/1868787-46440891.pdf?src-supplier=Element14, ComponentLink4Description=https://datasheet.ciiva.com/7983/443971-7983596.pdf?src-supplier=Element14, ComponentLink4URL=https://datasheet.ciiva.com/7983/443971-7983596.pdf?src-supplier=Element14, ComponentLink5Description=https://datasheet.ciiva.com/7746/1738695-7746239.pdf?src-supplier=Element14, ComponentLink5URL=https://datasheet.ciiva.com/7746/1738695-7746239.pdf?src-supplier=Element14, ComponentLink6Description=https://datasheet.ciiva.com/22747/443971-22747519.pdf?src-supplier=Element14, ComponentLink6URL=https://datasheet.ciiva.com/22747/443971-22747519.pdf?src-supplier=Element14, Composition="Thick Film", Depth=0.8mm, Height=0.45mm, Lead Free="Lead Free", Lead Pitch=0.3mm, Length=1.6mm, Manufacturer 2=Yageo, Manufacturer 3=Yageo, Manufacturer Part Number 1=RC0603FR-0710KL, Manufacturer Part Number 2=RC0603FR-0710KL, Manufacturer Part Number 3=RC0603FR-0710KL, Military Standard=Not, Number of Pins=2, Packaging="Tape and Reel", Pricing 1="1=0.10000, 10=0.02200, 100=0.00890, 1000=0.00401, 2500=0.00348 (USD)", Pricing 2="1=0.10000, 10=0.02200, 100=0.00890, 1000=0.00401, 2500=0.00348 (USD)", Pricing 3="5000=0.00261, 10000=0.00227, 25000=0.00199, 50000=0.00183, 125000=0.00179 (USD)", REACH SVHC="No SVHC", RoHS=Yes, Stock 1=80414305, Stock 2=80414305, Stock 3=80410000, Supplier 1=Digi-Key, Supplier 2=Digi-Key, Supplier 3=Digi-Key, Supplier Part Number 2=311-10.0KHRDKR-ND, Supplier Part Number 3=311-10.0KHRTR-ND, Termination=SMD/SMT, Weight=7.1E-05oz, Width=0.8mm
R53: library part CRCW040253K6FKED, "RES SMD 53.6K OHM 1% 1/16W 0402", Case/Package=0402, Case Code (Metric)=1005, Manufacturer 1=Vishay, Max Operating Temperature=155°C, Max Power Dissipation=63mW, Min Operating Temperature=-55°C, Package Quantity=10, Resistance=53.6kR, Supplier Part Number 1=541-53.6KLCT-ND, Temperature Coefficient=100ppm/°C, Tolerance=1%, Voltage Rating=50V, Case Code (Imperial)=0402, ComponentLink1Description=https://datasheet.ciiva.com/5542/dcrcwe3-109170-5542453.pdf?src-supplier=Mouser, ComponentLink1URL=https://datasheet.ciiva.com/5542/dcrcwe3-109170-5542453.pdf?src-supplier=Mouser, ComponentLink2Description=https://datasheet.ciiva.com/7815/1697337-7815992.pdf?src-supplier=Element14, ComponentLink2URL=https://datasheet.ciiva.com/7815/1697337-7815992.pdf?src-supplier=Element14, ComponentLink3Description=https://datasheet.ciiva.com/7815/1697337-7815993.pdf?src-supplier=Element14, ComponentLink3URL=https://datasheet.ciiva.com/7815/1697337-7815993.pdf?src-supplier=Element14, ComponentLink4Description=https://datasheet.ciiva.com/16208/dcrcwe3-16208556.pdf?src-supplier=Future+Electronics, ComponentLink4URL=https://datasheet.ciiva.com/16208/dcrcwe3-16208556.pdf?src-supplier=Future+Electronics, ComponentLink5Description=https://datasheet.ciiva.com/2464/dcrcwe3-2464093.pdf?src-supplier=Digi-Key, ComponentLink5URL=https://datasheet.ciiva.com/2464/dcrcwe3-2464093.pdf?src-supplier=Digi-Key, ComponentLink6Description=https://datasheet.ciiva.com/2464/dcrcwe3-2464094.pdf?src-supplier=Digi-Key, ComponentLink6URL=https://datasheet.ciiva.com/2464/dcrcwe3-2464094.pdf?src-supplier=Digi-Key, ComponentLink7Description=https://datasheet.ciiva.com/3256/dcrcwe3-3256638.pdf?src-supplier=Avnet, ComponentLink7URL=https://datasheet.ciiva.com/3256/dcrcwe3-3256638.pdf?src-supplier=Avnet, ComponentLink8Description=https://datasheet.ciiva.com/2464/dcrcwe3-2464095.pdf?src-supplier=Digi-Key, ComponentLink8URL=https://datasheet.ciiva.com/2464/dcrcwe3-2464095.pdf?src-supplier=Digi-Key, ComponentLink9Description=https://datasheet.ciiva.com/3256/dcrcwe3-3256639.pdf?src-supplier=Avnet, ComponentLink9URL=https://datasheet.ciiva.com/3256/dcrcwe3-3256639.pdf?src-supplier=Avnet, Composition="Thick Film", Contact Plating=Tin, Depth=0.5mm, Features="Automotive AEC-Q200", Height=0.016inch, Length=1mm, Manufacturer Part Number 1=CRCW040253K6FKED, Military Standard=Not, Number of Pins=2, Number of Terminations=2, Packaging="Tape and Reel", Power Rating=63mW, Pricing 1="1=0.10000, 10=0.03800, 100=0.01540, 1000=0.00690, 2500=0.00599, 5000=0.00495 (USD)", Radiation Hardening=No, REACH SVHC=Unknown, RoHS=Yes, Stock 1=82953, Supplier 1=Digi-Key, Weight=2.3E-05oz, Width=0.5mm
R54: library part CRCW040239K2FKED, "RES SMD 39.2K OHM 1% 1/16W 0402", Case/Package=0402, Case Code (Metric)=1005, Manufacturer 1=Vishay, Max Operating Temperature=155°C, Max Power Dissipation=63mW, Min Operating Temperature=-55°C, Package Quantity=10, Resistance=39.2kR, Supplier Part Number 1=541-39.2KLCT-ND, Temperature Coefficient=100ppm/°C, Tolerance=1%, Voltage Rating=50V, Case Code (Imperial)=0402, ComponentLink1Description=https://datasheet.ciiva.com/11818/0900766b80d98824-11818068.pdf?src-supplier=RSComponents, ComponentLink1URL=https://datasheet.ciiva.com/11818/0900766b80d98824-11818068.pdf?src-supplier=RSComponents, ComponentLink2Description=https://datasheet.ciiva.com/16882/dcrcwe3-16882152.pdf?src-supplier=Avnet+Europe, ComponentLink2URL=https://datasheet.ciiva.com/16882/dcrcwe3-16882152.pdf?src-supplier=Avnet+Europe, ComponentLink3Description=https://datasheet.ciiva.com/2463/dcrcwe3-2463561.pdf?src-supplier=Digi-Key, ComponentLink3URL=https://datasheet.ciiva.com/2463/dcrcwe3-2463561.pdf?src-supplier=Digi-Key, ComponentLink4Description=https://datasheet.ciiva.com/3256/dcrcwe3-3256469.pdf?src-supplier=Avnet, ComponentLink4URL=https://datasheet.ciiva.com/3256/dcrcwe3-3256469.pdf?src-supplier=Avnet, ComponentLink5Description=https://datasheet.ciiva.com/2463/dcrcwe3-2463559.pdf?src-supplier=Digi-Key, ComponentLink5URL=https://datasheet.ciiva.com/2463/dcrcwe3-2463559.pdf?src-supplier=Digi-Key, ComponentLink6Description=https://datasheet.ciiva.com/2463/dcrcwe3-2463560.pdf?src-supplier=Digi-Key, ComponentLink6URL=https://datasheet.ciiva.com/2463/dcrcwe3-2463560.pdf?src-supplier=Digi-Key, ComponentLink7Description=https://datasheet.ciiva.com/16774/70201119-16774809.pdf?src-supplier=Allied+Electronics, ComponentLink7URL=https://datasheet.ciiva.com/16774/70201119-16774809.pdf?src-supplier=Allied+Electronics, ComponentLink8Description=https://datasheet.ciiva.com/22869/70201119-22869593.pdf?src-supplier=Allied+Electronics, ComponentLink8URL=https://datasheet.ciiva.com/22869/70201119-22869593.pdf?src-supplier=Allied+Electronics, ComponentLink9Description=https://datasheet.ciiva.com/16429/dcrcwe3-16429962.pdf?src-supplier=Future+Electronics, ComponentLink9URL=https://datasheet.ciiva.com/16429/dcrcwe3-16429962.pdf?src-supplier=Future+Electronics, ComponentLink10Description=https://datasheet.ciiva.com/7671/1697337-7671596.pdf?src-supplier=Element14, ComponentLink10URL=https://datasheet.ciiva.com/7671/1697337-7671596.pdf?src-supplier=Element14, ComponentLink11Description=https://datasheet.ciiva.com/7671/1533075-7671772.pdf?src-supplier=Element14, ComponentLink11URL=https://datasheet.ciiva.com/7671/1533075-7671772.pdf?src-supplier=Element14, Composition="Thick Film", Contact Plating=Tin, Depth=0.5mm, Features="Automotive AEC-Q200", Height=0.35mm, Lead Free="Lead Free", Length=1mm, Manufacturer Part Number 1=CRCW040239K2FKED, Military Standard=Not, Number of Pins=2, Number of Terminations=2, Packaging="Tape and Reel", Power Rating=63mW, Pricing 1="1=0.10000, 10=0.03800, 100=0.01540, 1000=0.00690, 2500=0.00599, 5000=0.00495 (USD)", Radiation Hardening=No, REACH SVHC=Unknown, RoHS=Yes, Stock 1=46258, Supplier 1=Digi-Key, Termination=SMD/SMT, Voltage Rating (DC)=50V, Weight=2.3E-05oz, Width=0.5mm
TP1 TP2 TP3 TP4 TP5 TP6 TP50 TP51 TP52 TP53 TP55 TP56 TP57 TP58 TP59: library part TEST_POINT
U51: "IC REG LINEAR 1.8V 200MA SC70-5 Linear Voltage Regulator IC  1 Output  200mA SC-70-5", Case/Package=SC, Dropout Voltage=175mV, Manufacturer 1="Texas Instruments", Manufacturer Part Number 1=TLV70018DCKR, Manufacturer Part Number 2=TLV70018DCKT, Max Input Voltage=5.5V, Max Operating Temperature=125°C, Max Output Current=200mA, Max Output Voltage=1.8V, Max Power Dissipation=320mW, Min Current Limit=220mA, Min Input Voltage=2V, Min Operating Temperature=-40°C, Nominal Supply Current=31uA, Output Voltage Accuracy=2%, Package Quantity=1, Quiescent Current=30uA, Supplier Part Number 1=296-32409-1-ND, Accuracy=2%, ComponentLink1Description=https://datasheet.ciiva.com/41462/001014631-da-01-en-ic-reg-ldo-1-8v-0-tlv70018dckr-sot-5-tid-41462480.pdf?src-supplier=Conrad, ComponentLink1URL=https://datasheet.ciiva.com/41462/001014631-da-01-en-ic-reg-ldo-1-8v-0-tlv70018dckr-sot-5-tid-41462480.pdf?src-supplier=Conrad, ComponentLink2Description=https://datasheet.ciiva.com/22700/1882059-22700171.pdf?src-supplier=Element14, ComponentLink2URL=https://datasheet.ciiva.com/22700/1882059-22700171.pdf?src-supplier=Element14, ComponentLink3Description=https://datasheet.ciiva.com/14149/tlv700-eng-ds-14149837.pdf?src-supplier=Distrelec, ComponentLink3URL=https://datasheet.ciiva.com/14149/tlv700-eng-ds-14149837.pdf?src-supplier=Distrelec, ComponentLink4Description=https://datasheet.ciiva.com/7992/1882059-7992894.pdf?src-supplier=Element14, ComponentLink4URL=https://datasheet.ciiva.com/7992/1882059-7992894.pdf?src-supplier=Element14, Contact Plating=Gold, Height=1mm, Lead Free="Lead Free", Length=2.15mm, Manufacturer 2="Texas Instruments", Min Output Voltage=1.8V, Nominal Output Voltage=1.8V, Number of Outputs=1, Number of Pins=5, Number of Regulators=1, Output Current=200mA, Output Type=Fixed, Output Voltage=1.8V, Packaging="Tape and Reel", Polarity=Positive, Power Dissipation=320mW, Power Rating=320mW, Pricing 1="1=0.48000, 10=0.40900, 100=0.30570, 500=0.24020, 1000=0.18561 (USD)", Pricing 2="1=0.55000, 10=0.46700, 100=0.34900 (USD)", Radiation Hardening=No, REACH SVHC="No SVHC", RoHS=Yes, Stock 1=63905, Stock 2=13188, Supplier 1=Digi-Key, Supplier 2=Digi-Key, Supplier Part Number 2=296-25269-1-ND, Width=1.4mm
U52: "IC REG BUCK ADJ 1.2A SYNC 8WSON", Manufacturer 1="Texas Instruments", Manufacturer Part Number 1=TLV62080DSGR, Manufacturer Part Number 2=TLV62080DSGT, Max Input Voltage=5.5V, Max Operating Temperature=125°C, Max Output Current=1.2A, Max Output Voltage=4V, Min Input Voltage=2.5V, Min Operating Temperature=-40°C, Min Output Voltage=500mV, Nominal Supply Current=30uA, Package Quantity=3000, Supplier Part Number 1=296-39270-1-ND, Switching Frequency=2MHz, ComponentLink1Description=https://datasheet.ciiva.com/6604/tlv62080-6604087.pdf?src-supplier=Digi-Key, ComponentLink1URL=https://datasheet.ciiva.com/6604/tlv62080-6604087.pdf?src-supplier=Digi-Key, ComponentLink2Description=https://datasheet.ciiva.com/14378/tlv62080-14378282.pdf?src-supplier=Avnet, ComponentLink2URL=https://datasheet.ciiva.com/14378/tlv62080-14378282.pdf?src-supplier=Avnet, ComponentLink3Description=https://datasheet.ciiva.com/29732/tlv62080-29732147.pdf?src-supplier=Digi-Key, ComponentLink3URL=https://datasheet.ciiva.com/29732/tlv62080-29732147.pdf?src-supplier=Digi-Key, ComponentLink4Description=https://datasheet.ciiva.com/29732/tlv62080-29732156.pdf?src-supplier=Digi-Key, ComponentLink4URL=https://datasheet.ciiva.com/29732/tlv62080-29732156.pdf?src-supplier=Digi-Key, ComponentLink5Description=https://datasheet.ciiva.com/29732/tlv62080-29732151.pdf?src-supplier=Digi-Key, ComponentLink5URL=https://datasheet.ciiva.com/29732/tlv62080-29732151.pdf?src-supplier=Digi-Key, ComponentLink6Description=https://datasheet.ciiva.com/14378/tlv62080-14378283.pdf?src-supplier=Avnet, ComponentLink6URL=https://datasheet.ciiva.com/14378/tlv62080-14378283.pdf?src-supplier=Avnet, ComponentLink7Description=https://datasheet.ciiva.com/26104/tlv62080-26104460.pdf?src-supplier=Avnet+Europe, ComponentLink7URL=https://datasheet.ciiva.com/26104/tlv62080-26104460.pdf?src-supplier=Avnet+Europe, Contact Plating=Gold, Lead Free="Lead Free", Manufacturer 2="Texas Instruments", Min Supply Voltage=2.5V, Mount="Surface Mount", Number of Outputs=1, Number of Pins=8, Output Configuration=Positive, Output Current=1.2A, Output Type=Adjustable, Output Voltage=4V, Packaging="Tape and Reel", Pricing 1="1=1.35000, 10=1.20300, 100=0.93810, 500=0.77498, 1000=0.61182 (USD)", Pricing 2="1=1.48000, 10=1.32700, 100=1.06620 (USD)", Quiescent Current=30uA, Radiation Hardening=No, REACH SVHC="No SVHC", RoHS=Yes, Stock 1=93781, Stock 2=6366, Supplier 1=Digi-Key, Supplier 2=Digi-Key, Supplier Part Number 2=296-36759-1-ND, Synchronous Rectifier=Yes
U53: "IC REG LINEAR 2.8V 200MA SC70-5 Linear Voltage Regulator IC  1 Output  200mA SC-70-5", Case/Package=SC, Dropout Voltage=175mV, Manufacturer 1="Texas Instruments", Manufacturer Part Number 1=TLV70028DCKT, Manufacturer Part Number 2=TLV70028DCKR, Max Input Voltage=5.5V, Max Operating Temperature=125°C, Max Output Current=200mA, Max Output Voltage=2.8V, Max Power Dissipation=320mW, Min Current Limit=220mA, Min Input Voltage=2V, Min Operating Temperature=-40°C, Nominal Supply Current=31uA, Output Voltage Accuracy=2%, Package Quantity=1, Quiescent Current=30uA, Supplier Part Number 1=296-25271-1-ND, Accuracy=2%, ComponentLink1Description=https://datasheet.ciiva.com/14149/tlv700-eng-ds-14149840.pdf?src-supplier=Distrelec, ComponentLink1URL=https://datasheet.ciiva.com/14149/tlv700-eng-ds-14149840.pdf?src-supplier=Distrelec, ComponentLink2Description=https://datasheet.ciiva.com/22700/1882059-22700172.pdf?src-supplier=Element14, ComponentLink2URL=https://datasheet.ciiva.com/22700/1882059-22700172.pdf?src-supplier=Element14, ComponentLink3Description=http://components.arrow.com/part/dataview/0323_00585634?src-supplier=Arrow+Europe, ComponentLink3URL=http://components.arrow.com/part/dataview/0323_00585634?src-supplier=Arrow+Europe, ComponentLink4Description=http://focus.ti.com/lit/ds/symlink/tlv70033.pdf?src-supplier=Avnet+Europe, ComponentLink4URL=http://focus.ti.com/lit/ds/symlink/tlv70033.pdf?src-supplier=Avnet+Europe, ComponentLink5Description=http://www.ti.com/lit/ds/slvsa00d/slvsa00d.pdf?src-supplier=Digi-Key, ComponentLink5URL=http://www.ti.com/lit/ds/slvsa00d/slvsa00d.pdf?src-supplier=Digi-Key, ComponentLink6Description=http://www.ti.com/lit/pdf/slyy050?src-supplier=Digi-Key, ComponentLink6URL=http://www.ti.com/lit/pdf/slyy050?src-supplier=Digi-Key, ComponentLink7Description=http://www.ti.com/general/docs/lit/getliterature.tsp?genericPartNumber=TLV700&&fileType=pdf&src-supplier=Avnet+Asia, ComponentLink7URL=http://www.ti.com/general/docs/lit/getliterature.tsp?genericPartNumber=TLV700&&fileType=pdf&src-supplier=Avnet+Asia, ComponentLink8Description=http://www.ti.com/general/docs/lit/getliterature.tsp?genericPartNumber=TLV700&&fileType=pdf&src-supplier=Avnet, ComponentLink8URL=http://www.ti.com/general/docs/lit/getliterature.tsp?genericPartNumber=TLV700&&fileType=pdf&src-supplier=Avnet, ComponentLink9Description=http://components.arrow.com/part/dataview/48329233S8322732N7713?src-supplier=Arrow, ComponentLink9URL=http://components.arrow.com/part/dataview/48329233S8322732N7713?src-supplier=Arrow, ComponentLink10Description=http://www.ti.com/litv/slvsa00d?src-supplier=Mouser, ComponentLink10URL=http://www.ti.com/litv/slvsa00d?src-supplier=Mouser, ComponentLink11Description=http://www.ti.com/lit/ds/slvsa00e/slvsa00e.pdf?src-supplier=Digi-Key, ComponentLink11URL=http://www.ti.com/lit/ds/slvsa00e/slvsa00e.pdf?src-supplier=Digi-Key, Contact Plating=Gold, Height=1mm, Lead Free="Lead Free", Length=2.15mm, Manufacturer 2="Texas Instruments", Max Supply Voltage=5.5V, Min Output Voltage=2.8V, Min Supply Voltage=2V, Nominal Output Voltage=2.8V, Number of Outputs=1, Number of Pins=5, Number of Regulators=1, Output Current=200mA, Output Type=Fixed, Output Voltage=2.8V, Packaging="Tape and Reel", Polarity=Positive, Power Dissipation=320mW, Power Rating=320mW, Pricing 1="1=0.55000, 10=0.46700, 100=0.34900 (USD)", Pricing 2="1=0.48000, 10=0.40900, 100=0.30570, 500=0.24020, 1000=0.18561 (USD)", Radiation Hardening=No, REACH SVHC="No SVHC", RoHS=Yes, Stock 1=832, Stock 2=30013, Supplier 1=Digi-Key, Supplier 2=Digi-Key, Supplier Part Number 2=296-39279-1-ND, Termination=SMD/SMT, Width=1.4mm

## Via types
v1: diameter 0.4, hole 0.2, Top Copper to Bottom Layer, tented both sides, 79 vias
v2: diameter 0.3, hole 0.203, Top Copper to Bottom Layer, 2 vias

## Nets (pads, with @x,y where several pads share a name; then routed paths per layer and width w, separated by ;. In a path a pad name is that pad's centre, name@x,y a point inside that pad or via, vN(x,y) a via of type N, cw(c..) or ccw(c..) an arc to the next point about the centre after c; other vN are vias at no path point)
1.05V: C1.2 C2.2 FB50.2 J2.15 TP50.1 | length 19.6
  Top Copper w0.2: v1(-3.35,10.475) -2.944,10.475 -2.8,10.331 J2.15@-2.8,9.97
  Top Copper w0.3: v1(-11.575,-6.925) -10.925,-6.925 FB50.2@-10.9,-6.9 ; v1(-11.575,-6.15) -11.05,-6.15 FB50.2@-10.925,-6.275 ; FB50.2@-10.925,-6.15 FB50.2@-10.925,-6.275 ; C2.2@-10.9,-8.125 -10.9,-7.55 FB50.2@-10.9,-6.9 ; FB50.2@-10.6,-6.1 FB50.2@-10.725,-6.225 ; FB50.2@-10.225,-6.15 v1(-9.65,-6.15) ; v1(-9.65,-6.975) -10.225,-6.975 FB50.2 ; C1.2@-8.928,-4.967 -9.793,-4.967 -10.3,-5.474 -10.3,-6 -10.525,-6.225 FB50.2@-10.725,-6.225 ; FB50.2@-10.925,-6.275 FB50.2 ; FB50.2@-10.925,-6.275 FB50.2@-10.85,-6.35 ; FB50.2@-10.9,-6.9 FB50.2 ; FB50.2@-10.9,-6.9 FB50.2 ; FB50.2@-10.85,-6.35 FB50.2 ; FB50.2@-10.85,-6.35 FB50.2@-10.725,-6.225 ; FB50.2@-10.85,-6.35 FB50.2 ; FB50.2@-10.85,-6.35 FB50.2
  Bottom Layer w0.2: TP50.1@-3.35,10.468 v1(-3.35,10.475)
  Bottom Layer w0.3: -7.15,10.475 TP50.1@-3.914,10.475 ; -4.5,10.1 -4.309,10.291 TP50.1@-3.909,10.291 ; -4.375,10.725 -4.164,10.725 TP50.1@-3.914,10.475 ; -4.3,9.925 -4.275,9.95 -4.25,9.95 TP50.1@-3.909,10.291 ; -4.225,10.975 -4.2,10.975 ; -4.2,9.8 -3.675,10.325 TP50.1 ; TP50.1@-3.35,10.468 -3.357,10.475 TP50.1@-3.675,10.475 ; -4.2,10.975 -4.036,10.975 -3.675,10.614 TP50.1@-3.675,10.475 ; -4.2,10.975 TP50.1@-3.7,10.475 ; TP50.1@-3.914,10.475 TP50.1@-3.7,10.475 ; TP50.1@-3.914,10.475 -3.864,10.425 TP50.1@-3.775,10.425 ; TP50.1@-3.909,10.291 TP50.1@-3.775,10.425 ; TP50.1@-3.909,10.291 -3.809,10.291 TP50.1 ; TP50.1@-3.775,10.425 TP50.1 ; TP50.1@-3.7,10.475 TP50.1@-3.675,10.475 ; TP50.1@-3.7,10.475 TP50.1@-3.675,10.45 ; TP50.1 TP50.1@-3.675,10.45 ; TP50.1@-3.675,10.45 TP50.1@-3.675,10.475
1.8V: C3.2 C4.2 FB51.2 J2.13 TP51.1 | length 14.4
  Top Copper w0.2: FB51.2@-10.71,6.248 -10.71,7.075 -10.134,7.65 -9.475,7.65 -7.691,9.434 ; -7.7,9.434 -7.691,9.434 ; v1(-5.575,9.35) -5.575,10.01 -5.602,10.037 -6.204,9.434 -6.897,9.434 -7.691,9.434 ; v1(-2.125,11.075) -2.125,11.021 -2,10.896 -2,10.331 ; J2.13 -2,10.331 ; -2,10.613 -2,10.331
  Bottom Layer w0.2: v1(-5.575,9.35) -2.425,9.35 TP51.1 cw(c-2,9.9) -2.125,9.9 v1(-2.125,11.075)
2.8V: C5.2 C6.2 FB52.2 J2.11 J2.18 TP53.1 | length 35.5
  Top Copper w0.15: J2.11 -1.2,10.331 ; -1.2,10.594 -1.2,10.331 ; v1(-1.05,11.075) -1.05,11.007 -1.2,10.857 -1.2,10.331
  Top Copper w0.2: v1(-2,6.875) -2,7.275 ; v1(5.1,10.775) 5.1,10.782 5.224,10.906 5.874,10.906 5.874,10.228 6.466,9.636 6.666,9.436 6.666,9.159 8.142,7.683 8.395,7.43 8.395,6.78 8.7,6.475 8.7,-1.401 8.395,-1.706 8.395,-3.745 9,-4.35 9,-5 9.15,-5.15 10.408,-5.15 10.525,-5.267 10.525,-7.525 FB52.2@10.725,-7.725
  Layer 1 w0.2: v1(-2,6.875) -2,8.302 -1.075,9.227 -1.075,9.875 ; v1@-1.075,11.05 -1.075,9.875 ; v1(5.1,10.775) 3.95,10.775 3,9.825 -1.025,9.825 -1.075,9.875
  Bottom Layer w0.2: v1@-1.075,11.05 v1(-1.05,11.075)
AUX_IO1: J1.23 TP5.1 | length 2.7
  Top Copper w0.15: v1(4.575,-9.35) 4.575,-9.325 4.75,-9.15 4.75,-8.425 J1.23
  Bottom Layer w0.15: TP5.1@3.75,-8.647 3.811,-8.647 4.514,-9.35 v1(4.575,-9.35)
AUX_IO2: J1.24 TP6.1 | length 2.5
  Top Copper w0.15: J1.24 5.25,-8.425 5.262,-8.438 5.262,-9.162 v1(5.45,-9.35)
  Bottom Layer w0.15: v1@5.45,-9.243 v1(5.45,-9.35) 5.462,-9.337 5.462,-8.563 TP6.1
CAM_CLK: D3.4 D3.7 J1.17 J2.30 TP1.1 | length 34.2
  Top Copper w0.1: D3.7 1.7,-7.8 J1.17 1.75,-8.425 1.75,-9.5 2.6,-10.35 6.15,-10.35 8,-8.5 v1(8.7,-8.5) ; J2.30 2.86,7.63 2.86,7.708 3.001,7.708 3.244,7.95 v1(3.325,7.95)
  Bottom Layer w0.1: v1@3.325,7.875 3.55,8.1 6.575,8.1 7.425,7.25 7.425,-7.225 v1(8.7,-8.5) TP1.1@8.9,-8.3
CAM_RST: D3.5 D3.6 J1.18 J2.23 R1.1 TP2.1 | length 37.4
  Top Copper w0.1: v1(0,6.875) J2.23 ; D3.6 2.2,-7.8 J1.18 2.25,-8.425 2.25,-9.45 2.8,-10 5.9,-10 6.725,-9.175 6.725,-8.525 ; v1(6.975,-8.525) 6.725,-8.525 ; R1.1@9.788,-6.125 9.788,-6.155 9.325,-6.618 9.325,-7.425 9.025,-7.725 7.175,-7.725 6.725,-8.175 6.725,-8.525
  Bottom Layer w0.1: v1(0,6.875) 0.675,7.55 1.225,7.55 1.875,6.9 4.95,6.9 5.65,6.2 5.65,-7.075 TP2.1
GND: C1.1 C2.1 C3.1 C4.1 C5.1 C6.1 C53.1 C54.1 C55.1 C56.1 C57.1 C58.1 D1.3 D1.8 D2.3 D2.8 D3.3 D3.8 J1.1 J1.4 J1.7 J1.10 J1.13 J1.16 J1.19 J1.22 J1.MP1 J1.MP2 J2.1 J2.4 J2.7 J2.10 J2.12 J2.14 J2.17 J2.24 J2.29 R1.2 R54.1 TP52.1 TP55.1 TP56.1 TP57.1 TP58.1 TP59.1 U51.2 U52.2 U52.3 U52.9 U53.2 | length 52.3
  Top Copper w0.1: C1.1@-8.011,-4.908 v1(-8.011,-4.183)
  Top Copper w0.127: J2.29 2.433,7.537 2.433,7.228 2.507,7.153 3.353,7.153 3.734,7.534 3.825,7.625 v1(4,7.625)
  Top Copper w0.15: v1(-0.5,10.975) -0.5,11.275 0.4,11.275 ; v1(0.4,10.9) 0.4,11.275 ; v1(1.6,10.9) 1.6,11.275 ; v1(2.8,10.9) 2.8,11.275 1.6,11.275 ; 0.4,11.275 1.6,11.275